# Altium PCB turret1.PcbDoc
Units mm, origin at the board's own origin, x right, y up, seen from the top; angles counter-clockwise.
Board outline 80 x 80 mm, 2 copper layers (Top Layer, Bottom Layer); 78 components, 59 nets, 253 pads, 29 vias.
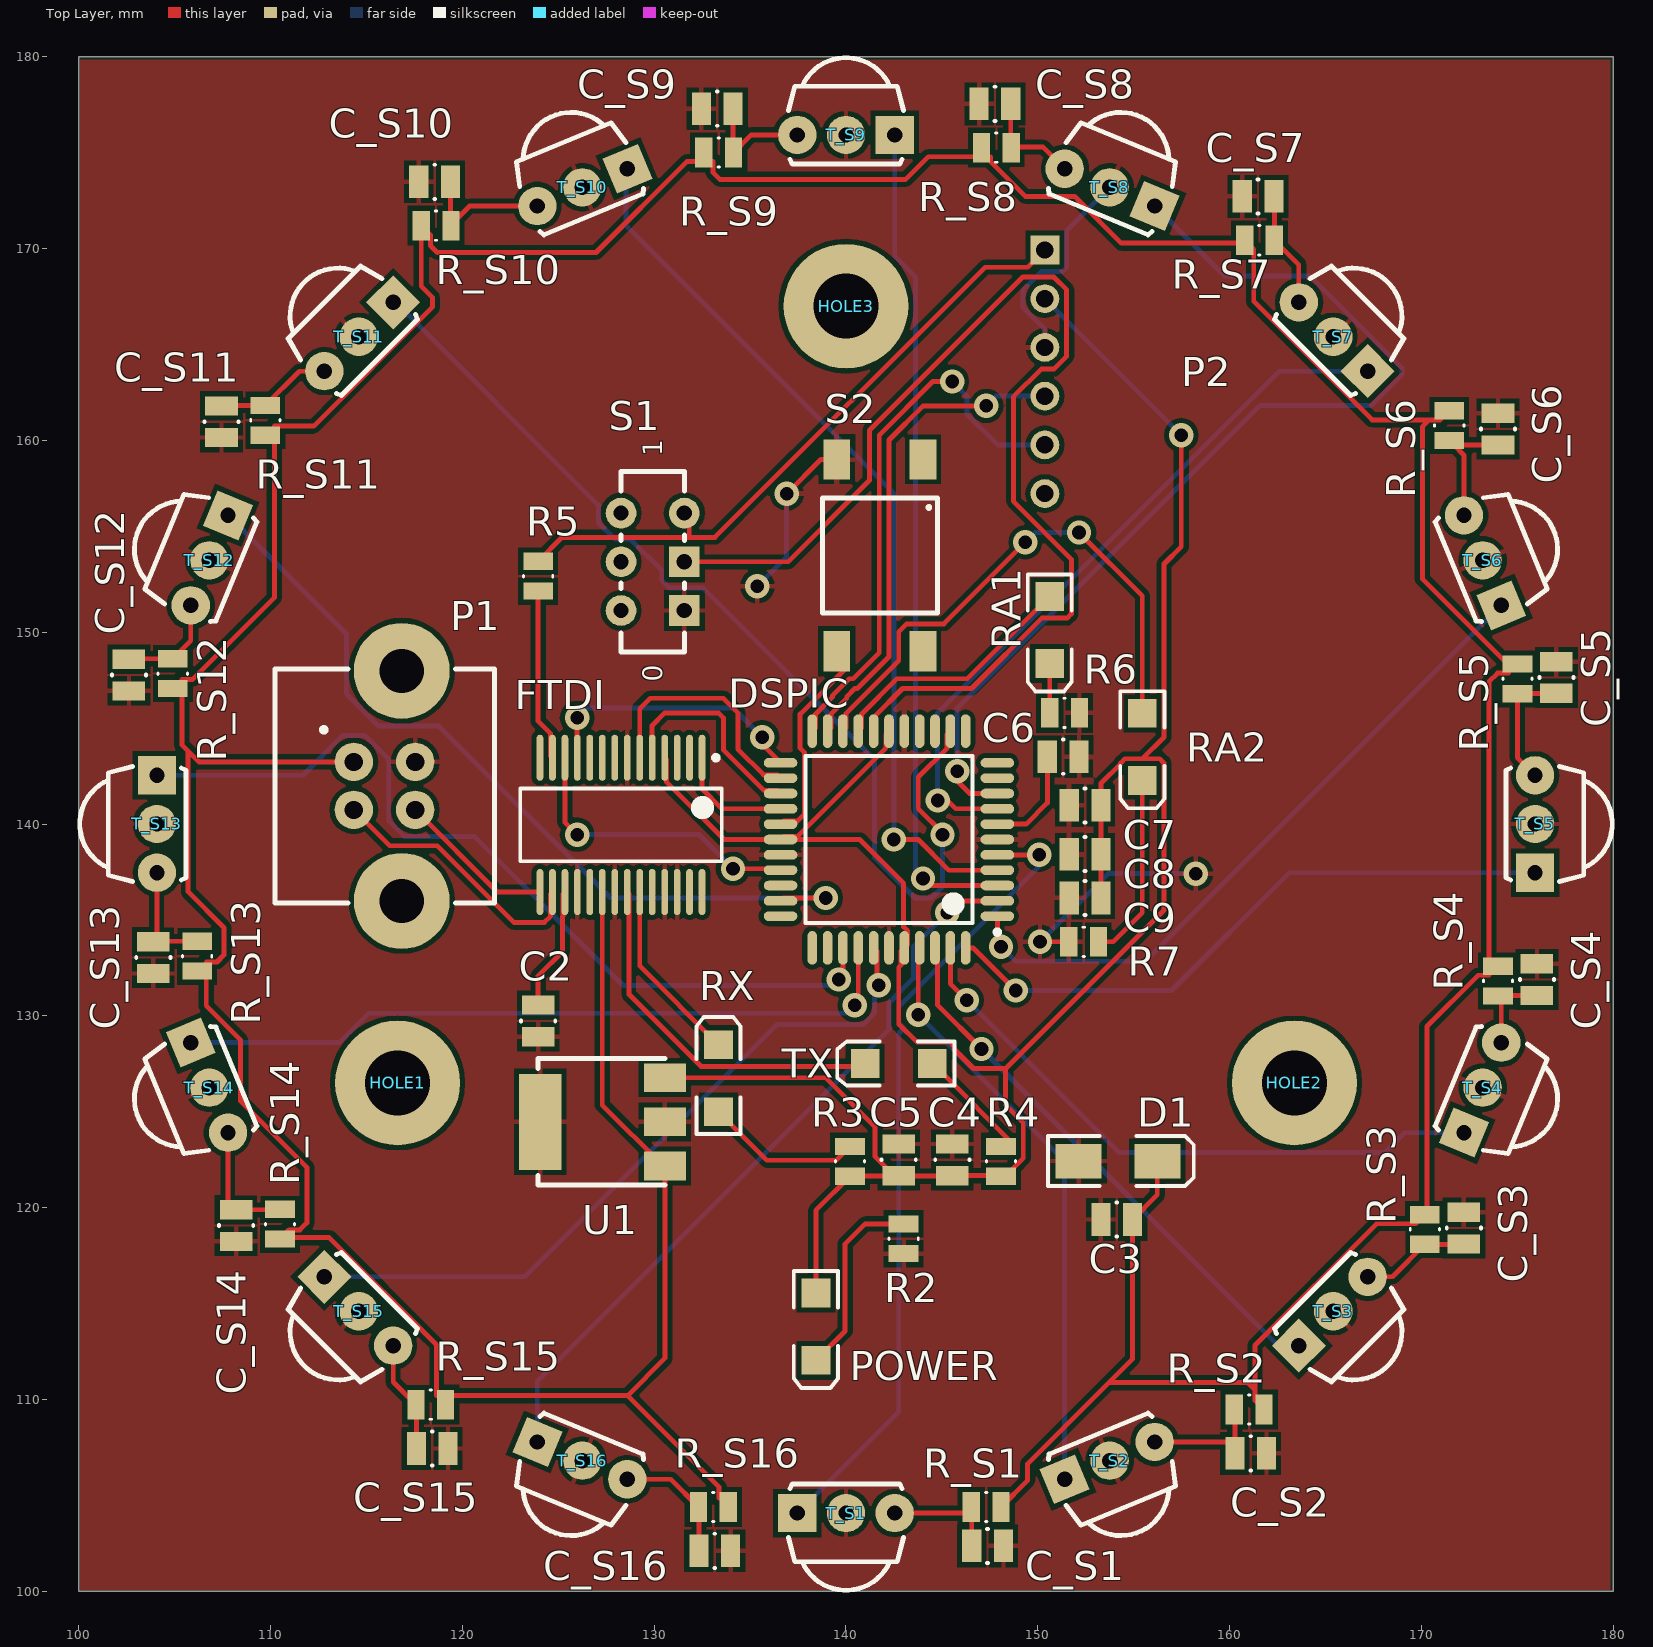
[diagram p0: Top Layer view]
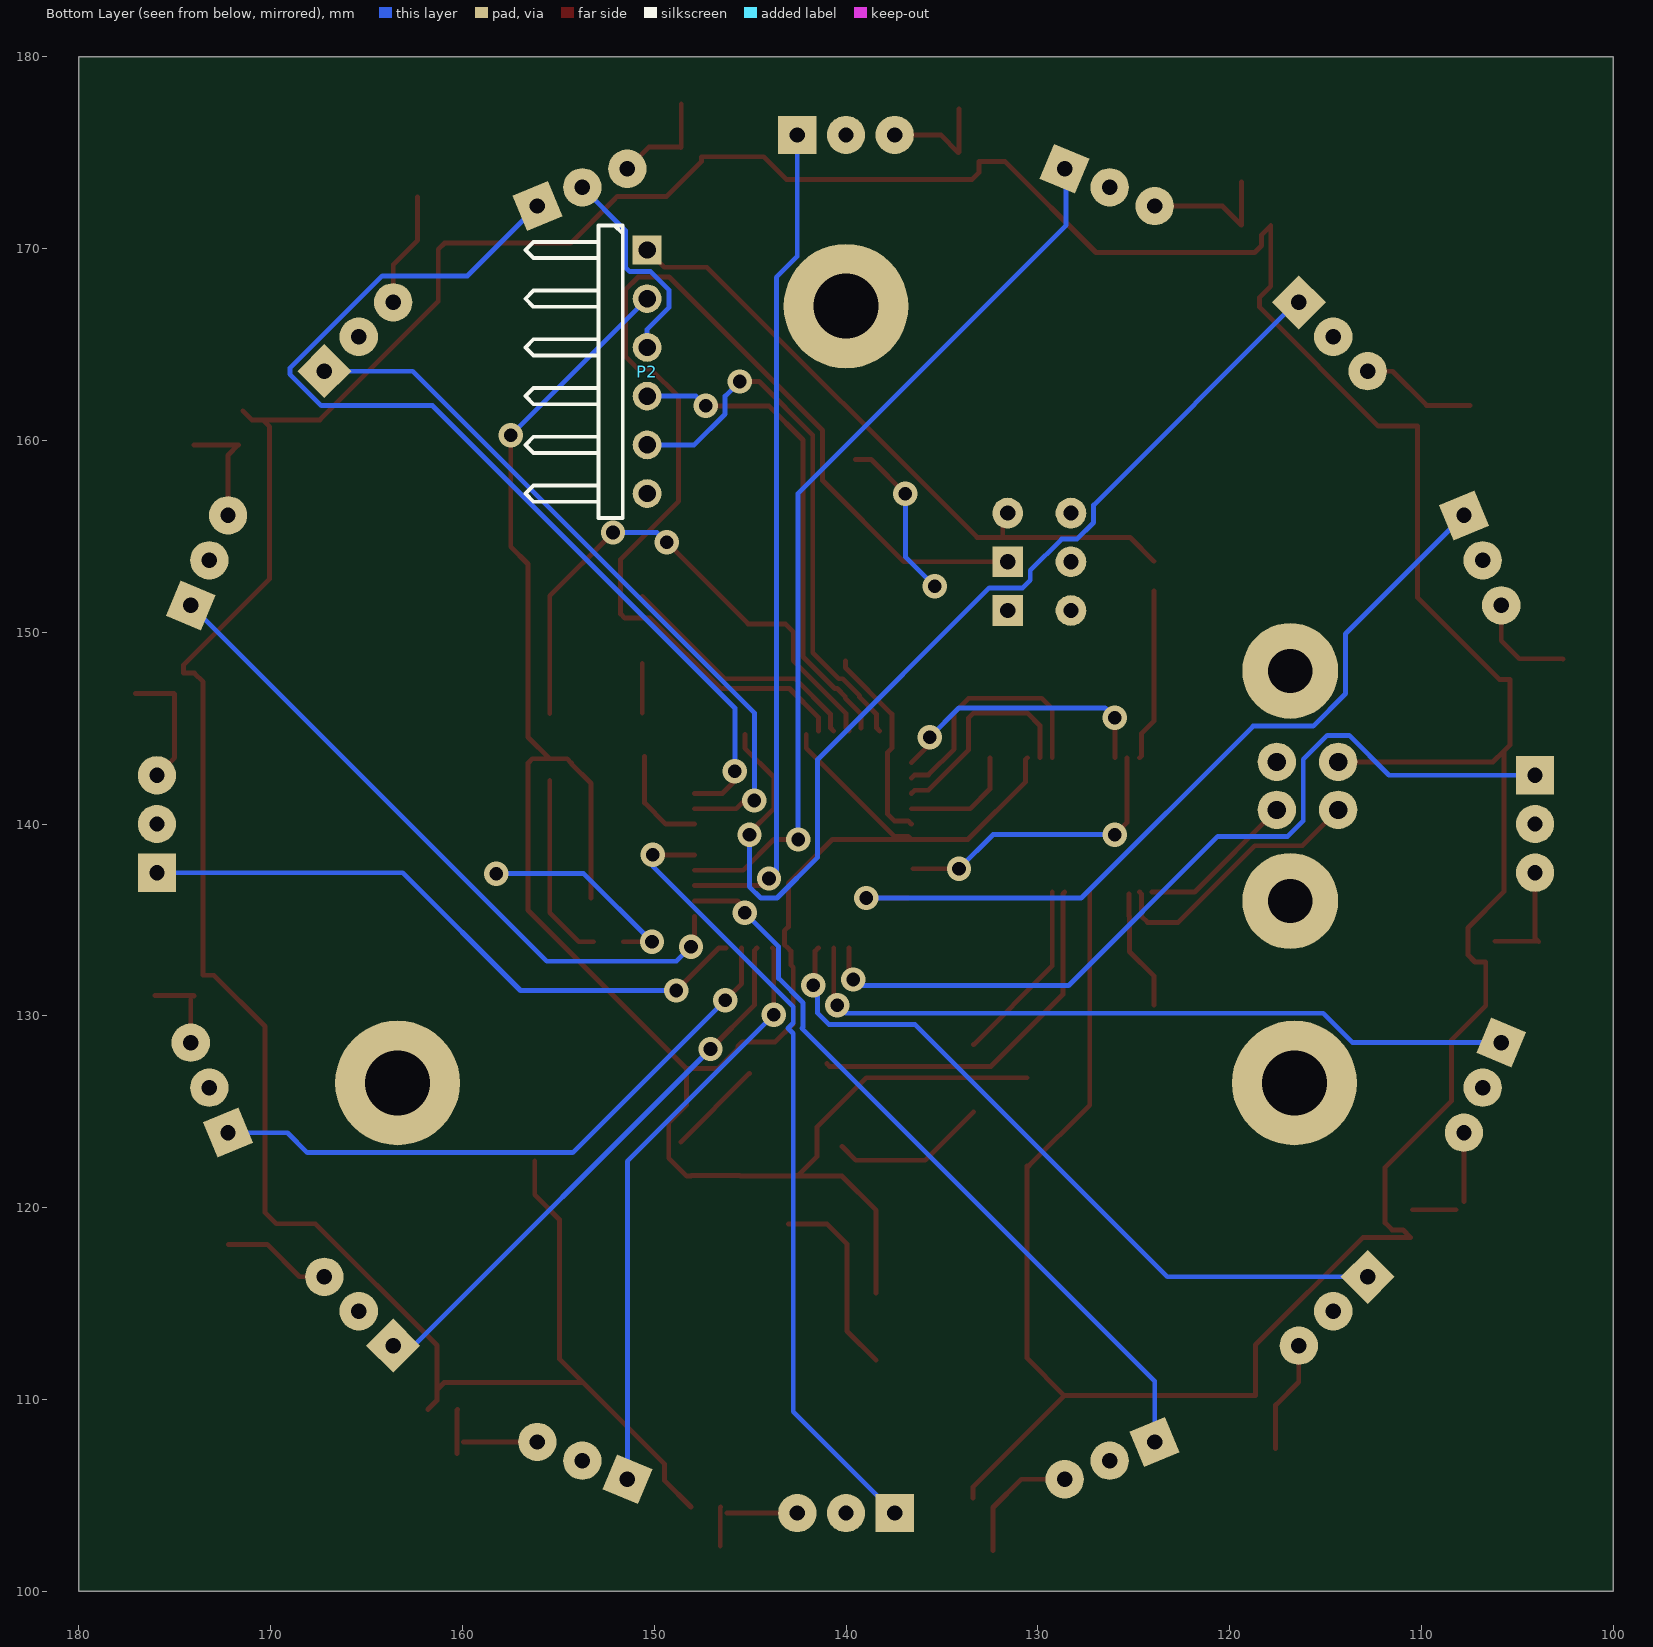
[diagram p1: Bottom Layer view, seen from below]
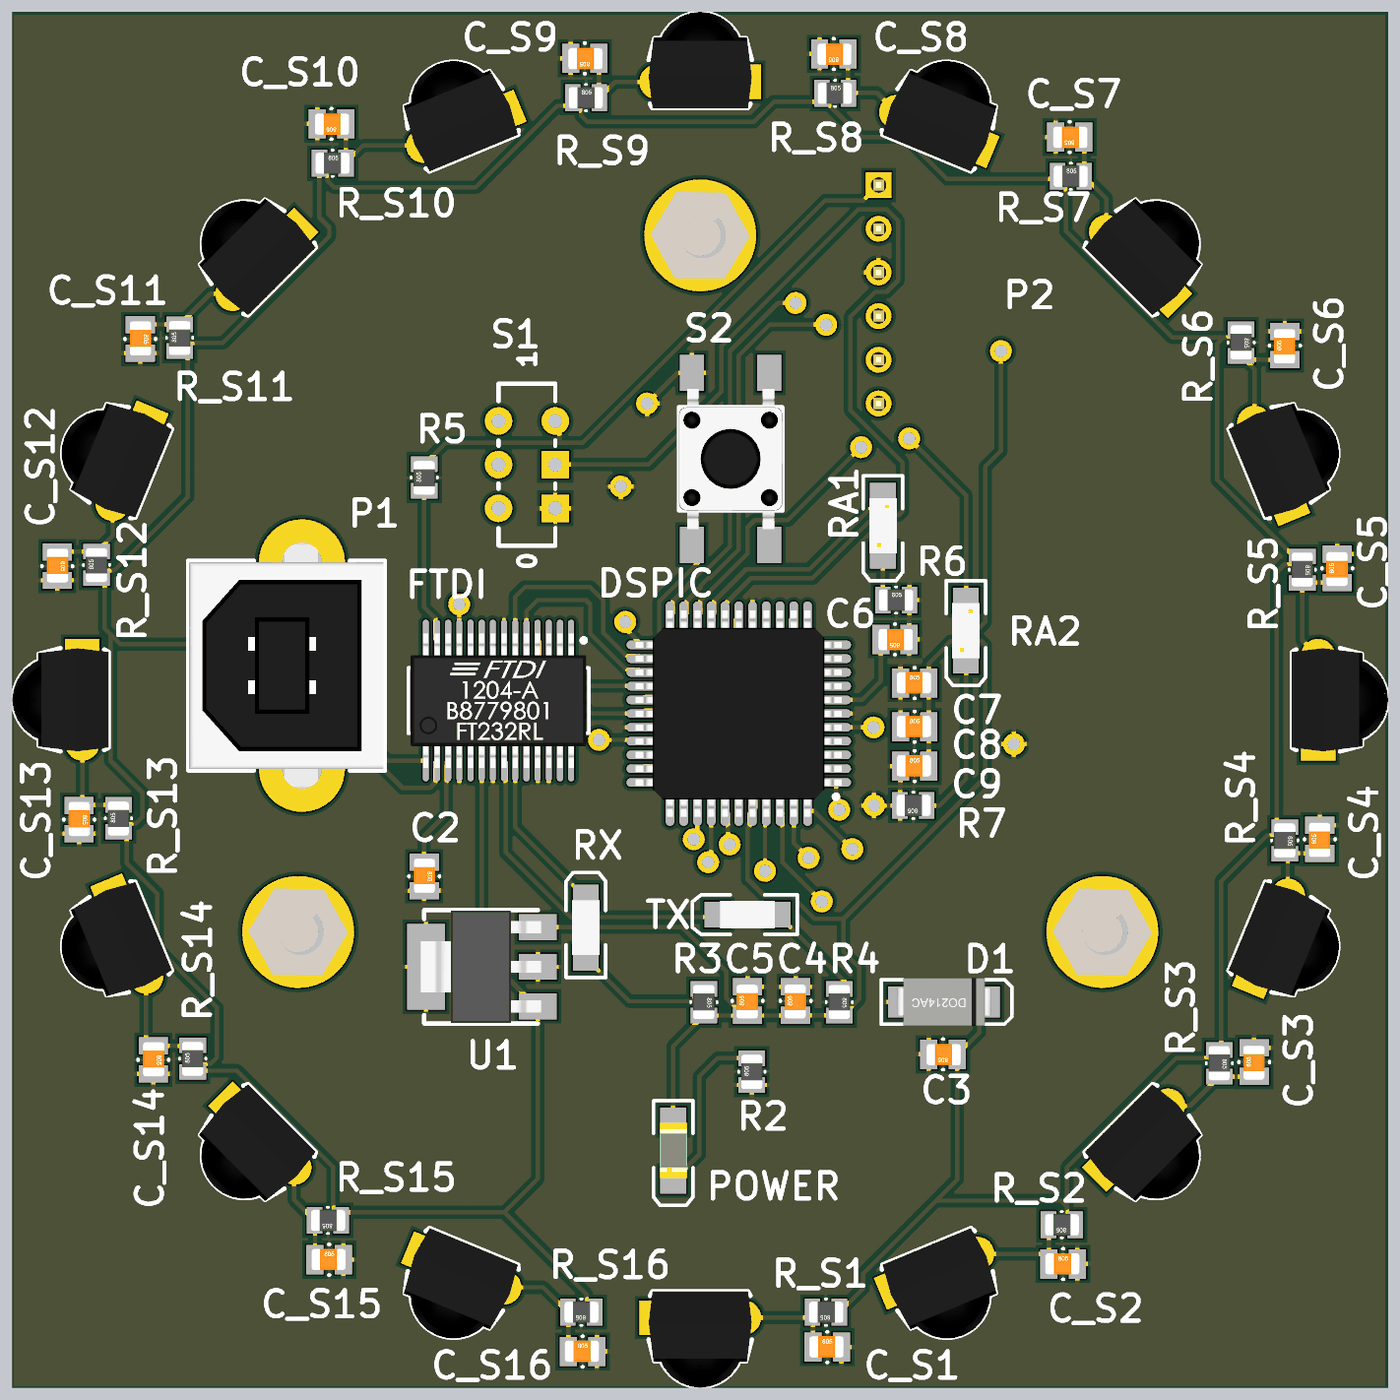
[diagram p2: 3D render of the assembled board from above, using the file's embedded part models]

## Layer stack, top to bottom
Top Layer: signal copper 0.0356
Dielectric: dielectric 0.32, FR-4, Dk 4.8
Bottom Layer: signal copper 0.0356

## Board outline
100,100 180,100 180,180 100,180

## Design rules (kind name [scope] priority, off if disabled: settings)
Clearance [All] p1: gap=0.254
HoleSize [All] p1: absolutevalues=TRUE maxlimit=3.556 minlimit=0.025 maxpercent=80.000 minpercent=20.000
MinimumSolderMaskSliver [All] p1: minsoldermaskwidth=0.025
PolygonConnect [All] p1: connectstyle=Relief reliefconductorwidth=0.254 reliefentries=4 polygonreliefangle="90 Angle"
RoutingVias [All] p1: holewidth=0.711 width=1.27 viastyle="Through Hole" minholewidth=0.711 minwidth=1.27 maxholewidth=0.711 maxwidth=1.27
SilkToSilkClearance [All] p1: silktosilkclearance=0.025
SilkscreenOverComponentPads [All] p1: minsilkscreentomaskgap=0.025
SolderMaskExpansion [All] p1: expansion=0.102
Width [All] p1: maxlimit=0.508 minlimit=0.254 preferedwidth=0.254
24 further rules are at their usual default settings.

## Classes and differential pairs
channel class tsop: S1 S2 S3 S4 S5 S6 S7 S8 S9 S10 S11 S12 S13 S14 S15 S16 S17 S18 S19 S20 S21 S22 S23 S24
net class TSOP[1..16]: TSOP1 TSOP2 TSOP3 TSOP4 TSOP5 TSOP6 TSOP7 TSOP8 TSOP9 TSOP10 TSOP11 TSOP12 TSOP13 TSOP14 TSOP15 TSOP16
component class turret1: C2 C3 C4 C5 C6 C7 C8 C9 D1 DSPIC FTDI HOLE1 HOLE2 HOLE3 P1 P2 POWER R2 R3 R4 R5 R6 R7 RA1 RA2 RX S1 S2 TX U1
component class S16: C_S16 R_S16 T_S16
component class S15: C_S15 R_S15 T_S15
component class S14: C_S14 R_S14 T_S14
component class S13: C_S13 R_S13 T_S13
component class S12: C_S12 R_S12 T_S12
component class S11: C_S11 R_S11 T_S11
component class S10: C_S10 R_S10 T_S10
component class S9: C_S9 R_S9 T_S9
component class S8: C_S8 R_S8 T_S8
component class S7: C_S7 R_S7 T_S7
component class S6: C_S6 R_S6 T_S6
component class S5: C_S5 R_S5 T_S5
component class S4: C_S4 R_S4 T_S4
component class S3: C_S3 R_S3 T_S3
component class S2: C_S2 R_S2 T_S2
component class S1: C_S1 R_S1 T_S1

## Components (designator, comment, footprint, x,y, rotation, side; value= is the part's Value field where it differs from the comment)
C2 "CAP" C0805C 123.952,130.556 r270 top
C3 "" C0805C 154.94,119.38 r180 top
C4 "" C0805C 145.542,121.666 r90 top
C5 "" C0805C 142.748,121.666 r90 top
C6 "CAP" C0805C 152.146,143.51 r180 top
C7 "CAP" C0805C 151.638,140.97 r0 top
C8 "CAP" C0805C 151.638,138.43 r0 top
C9 "CAP" C0805C 151.638,136.144 r0 top
C_S1 "CAP" C0805C 146.558,102.362 r0 top (schematic designator C)
C_S2 "CAP" C0805C 160.274,107.188 r0 top (schematic designator C)
C_S3 "CAP" C0805C 172.212,118.11 r90 top (schematic designator C)
C_S4 "CAP" C0805C 176.022,131.064 r90 top (schematic designator C)
C_S5 "CAP" C0805C 177.038,146.812 r90 top (schematic designator C)
C_S6 "CAP" C0805C 173.99,159.766 r90 top (schematic designator C)
C_S7 "CAP" C0805C 162.306,172.72 r180 top (schematic designator C)
C_S8 "CAP" C0805C 148.59,177.546 r180 top (schematic designator C)
C_S9 "CAP" C0805C 134.112,177.292 r180 top (schematic designator C)
C_S10 "CAP" C0805C 119.38,173.482 r180 top (schematic designator C)
C_S11 "CAP" C0805C 107.442,161.798 r270 top (schematic designator C)
C_S12 "CAP" C0805C 102.616,148.59 r270 top (schematic designator C)
C_S13 "CAP" C0805C 103.886,133.858 r270 top (schematic designator C)
C_S14 "CAP" C0805C 108.204,119.888 r270 top (schematic designator C)
C_S15 "CAP" C0805C 117.602,107.442 r0 top (schematic designator C)
C_S16 "CAP" C0805C 132.334,102.108 r0 top (schematic designator C)
D1 "5.6V" DSO-C2/X1.8 154.178,122.428 r0 top
DSPIC "DSPIC33FJ64MC804-I/PT" TQFP-PT44_N 142.24,139.192 r180 top
FTDI "FT232RL" SSOP-28_M 128.27,139.954 r270 top
HOLE1 "Hole" SCREW 116.62,126.5 r0 top
HOLE2 "Hole" SCREW 163.38,126.5 r0 top
HOLE3 "Hole" SCREW 140,167 r0 top
P1 "USB Vertical" "USB type B Vert" 116.84,141.986 r90 top
P2 "PICkit" HDR1X6H 150.368,169.926 r270 bottom
POWER "LED" LED1206G 138.43,113.792 r270 top
R2 "" C0805R 143.002,117.602 r90 top
R3 "RES" C0805R 140.208,123.19 r270 top
R4 "RES" C0805R 148.082,123.19 r270 top
R5 "RES" C0805R 123.952,152.146 r90 top
R6 "RES" C0805R 150.622,145.796 r0 top
R7 "RES" C0805R 153.162,133.858 r180 top
R_S1 "RES" C0805R 148.082,104.394 r180 top (schematic designator R)
R_S2 "RES" C0805R 161.798,109.474 r180 top (schematic designator R)
R_S3 "RES" C0805R 170.18,119.634 r270 top (schematic designator R)
R_S4 "RES" C0805R 173.99,132.588 r270 top (schematic designator R)
R_S5 "RES" C0805R 175.006,148.336 r270 top (schematic designator R)
R_S6 "RES" C0805R 171.45,161.544 r270 top (schematic designator R)
R_S7 "RES" C0805R 160.782,170.434 r0 top (schematic designator R)
R_S8 "RES" C0805R 147.066,175.26 r0 top (schematic designator R)
R_S9 "RES" C0805R 132.588,175.006 r0 top (schematic designator R)
R_S10 "RES" C0805R 117.856,171.196 r0 top (schematic designator R)
R_S11 "RES" C0805R 109.728,160.274 r90 top (schematic designator R)
R_S12 "RES" C0805R 104.902,147.066 r90 top (schematic designator R)
R_S13 "RES" C0805R 106.172,132.334 r90 top (schematic designator R)
R_S14 "RES" C0805R 110.49,118.364 r90 top (schematic designator R)
R_S15 "RES" C0805R 119.126,109.728 r180 top (schematic designator R)
R_S16 "RES" C0805R 133.858,104.394 r180 top (schematic designator R)
RA1 "LED" LED1206R 150.622,150.114 r270 top
RA2 "LED" LED1206R 155.448,144.018 r270 top
RX "LED" LED1206Y 133.35,126.746 r90 top
S1 "SW-DPDT/Reset" MCLSS22 131.572,153.67 r90 top
S2 "RC2" SPST-NO 144.018,159.004 r180 top
T_S1 "TSOP7000" "TSOP IR" 140,140 r0 top (schematic designator T)
T_S2 "TSOP7000" "TSOP IR" 140,140 r22.5 top (schematic designator T)
T_S3 "TSOP7000" "TSOP IR" 140,140 r45 top (schematic designator T)
T_S4 "TSOP7000" "TSOP IR" 140,140 r67.5 top (schematic designator T)
T_S5 "TSOP7000" "TSOP IR" 140,140 r90 top (schematic designator T)
T_S6 "TSOP7000" "TSOP IR" 140,140 r112.5 top (schematic designator T)
T_S7 "TSOP7000" "TSOP IR" 140,140 r135 top (schematic designator T)
T_S8 "TSOP7000" "TSOP IR" 140,140 r157.5 top (schematic designator T)
T_S9 "TSOP7000" "TSOP IR" 140,140 r180 top (schematic designator T)
T_S10 "TSOP7000" "TSOP IR" 140,140 r202.5 top (schematic designator T)
T_S11 "TSOP7000" "TSOP IR" 140,140 r225 top (schematic designator T)
T_S12 "TSOP7000" "TSOP IR" 140,140 r247.5 top (schematic designator T)
T_S13 "TSOP7000" "TSOP IR" 140,140 r270 top (schematic designator T)
T_S14 "TSOP7000" "TSOP IR" 140,140 r292.5 top (schematic designator T)
T_S15 "TSOP7000" "TSOP IR" 140,140 r315 top (schematic designator T)
T_S16 "TSOP7000" "TSOP IR" 140,140 r337.5 top (schematic designator T)
TX "LED" LED1206Y 142.748,127.508 r180 top
U1 "LM2937IMP-3.3" SOT-223 130.556,122.174 r90 top

## Footprints (in the part's own frame and the unit in brackets; to place one, negate y for a bottom-side part, rotate by r counter-clockwise, add the part's x,y. Pads: shape width x height; smd on the part's side, far side on the other; paste and mask are expansions set on the pad)
C0805C [mm]
  rect 1x1.7 smd: 1(0,0) 2(1.65,0)
  silkscreen extent 0.8,-0.89 0.85,0.89, body extent -0.21,-0.61 1.79,0.64, height 0.78
C0805R [mm]
  rect 0.9x1.55 smd: 1(0,0) 2(1.55,0)
  silkscreen extent 0.73,-0.76 0.81,0.76, body extent -0.24,-0.62 1.76,0.63, height 0.78
DSO-C2/X1.8 [mm] "Diode; DO-214-AC/SMA; 2 C-Bend Leads; Body 5 x 2.7 mm, inc. leads (LxW)"
  rect 2.4x1.8 smd: A(2.05,0) K(-2.05,0)
  silkscreen extent -3.65,-1.3 3.95,1.3, body extent -2.74,-1.4 2.74,1.4, height 2.28
HDR1X6H [mm] "Connector; Header; 6 Position; Right Angle"
  rect 1.5x1.5 hole 0.9: 1(0,0)
  round 1.5 hole 0.9: 2(2.54,0) 3(5.08,0) 4(7.62,0) 5(10.16,0) 6(12.7,0)
  silkscreen extent -1.27,-6.35 13.97,-1.27, body extent -1.17,-5.85 13.87,1.25, height 5.42
LED1206G [mm] "SMT LED; 2 Flat Leads; 3.2X1.6X1.1"
  rect 1.5x1.5 smd: 1(-1.75,0) 2(1.75,0)
  silkscreen extent -2.9,-1.15 3.2,1.15, body extent -1.6,-0.8 1.6,0.8, height 1.11
LED1206R [mm] "SMT LED; 2 Flat Leads; 3.2X1.6X1.1"
  rect 1.5x1.5 smd: 1(-1.75,0) 2(1.75,0)
  silkscreen extent -2.9,-1.15 3.2,1.15, body extent -1.6,-0.8 1.6,0.8, height 1.11
LED1206Y [mm] "SMT LED; 2 Flat Leads; 3.2X1.6X1.1"
  rect 1.5x1.5 smd: 1(-1.75,0) 2(1.75,0)
  silkscreen extent -2.9,-1.15 3.2,1.15, body extent -1.6,-0.8 1.6,0.8, height 1.11
MCLSS22 [mm] "Slide Switch DPDT"
  rect 1.6x1.6 hole 0.8: 1(0,0) 2(-2.54,0)
  round 1.6 hole 0.8: 3(2.54,0) 4(0,3.3) 5(-2.54,3.3) 6(2.54,3.3)
  silkscreen extent -4.7,0 4.7,3.3, body extent -4.7,-2 4.7,3.3, height 3.5
SCREW [mm] "Mounting Hole M3"
  round 6.5 hole 3.4: 1(0,0)
  body extent -2.89,-2.52 2.89,2.52, height 10
SOT-223 [mm] "Surface mounted, 4 pin package"
  rect 1.5x2.2 smd: 1(0,0) 2(2.3,0) 3(4.6,0)
  rect 5x2.2 smd: 4(2.3,6.5)
  silkscreen extent -1,0 5.6,6.6, body extent -0.95,-0.2 5.55,6.8, height 1.64
SPST-NO [mm] "Tactile Switch SPST-NO 6x6mm"
  rect 1.4x2.1 smd: 1(0,0) 2(4.5,0) 3(4.5,10) 4(0,10)
  silkscreen extent -0.75,2 5.25,8, body extent -0.75,0.93 5.25,9.08, height 5
SSOP-28_M [mm] "SOP, 28-Leads, Body 10.2x5.3mm, Pitch 0.65mm, IPC Low Density"
  oval 2.4x0.35 smd: 1(-3.5,4.225) 2(-3.5,3.575) 3(-3.5,2.925) 4(-3.5,2.275) 5(-3.5,1.625) 6(-3.5,0.975) 7(-3.5,0.325) 8(-3.5,-0.325) 9(-3.5,-0.975) 10(-3.5,-1.625) 11(-3.5,-2.275) 12(-3.5,-2.925) 13(-3.5,-3.575) 14(-3.5,-4.225) 15(3.5,-4.225) 16(3.5,-3.575) 17(3.5,-2.925) 18(3.5,-2.275) 19(3.5,-1.625) 20(3.5,-0.975) 21(3.5,-0.325) 22(3.5,0.325) 23(3.5,0.975) 24(3.5,1.625) 25(3.5,2.275) 26(3.5,2.925) 27(3.5,3.575) 28(3.5,4.225)
  silkscreen extent -3.62,-5.25 1.9,5.25, body extent -3.91,-5.1 3.91,5.1, height 1.98
TQFP-PT44_N [mm] "Thin QFP, 44-Leads, Body 10x10mm, Pitch 0.8mm, IPC Medium Density"
  oval 1.75x0.5 smd: 1(-5.65,4) 2(-5.65,3.2) 3(-5.65,2.4) 4(-5.65,1.6) 5(-5.65,0.8) 6(-5.65,0) 7(-5.65,-0.8) 8(-5.65,-1.6) 9(-5.65,-2.4) 10(-5.65,-3.2) 11(-5.65,-4) 23(5.65,-4) 24(5.65,-3.2) 25(5.65,-2.4) 26(5.65,-1.6) 27(5.65,-0.8) 28(5.65,0) 29(5.65,0.8) 30(5.65,1.6) 31(5.65,2.4) 32(5.65,3.2) 33(5.65,4)
  oval 0.5x1.75 smd: 12(-4,-5.65) 13(-3.2,-5.65) 14(-2.4,-5.65) 15(-1.6,-5.65) 16(-0.8,-5.65) 17(0,-5.65) 18(0.8,-5.65) 19(1.6,-5.65) 20(2.4,-5.65) 21(3.2,-5.65) 22(4,-5.65) 34(4,5.65) 35(3.2,5.65) 36(2.4,5.65) 37(1.6,5.65) 38(0.8,5.65) 39(0,5.65) 40(-0.8,5.65) 41(-1.6,5.65) 42(-2.4,5.65) 43(-3.2,5.65) 44(-4,5.65)
  silkscreen extent -5.77,-4.35 4.35,4.95, body extent -6,-6 6,6, height 1.05
"TSOP IR" [mm] "TSOP IR Receiver, Vishay"
  rect 2x2 hole 0.8: 1(-2.54,-35.924)
  round 2 hole 0.8: 2(0,-35.924) 3(2.54,-35.924)
  silkscreen extent -3,-39.95 3,-34.4, body extent -3,-40 3,-34.4, height 8.45
"USB type B Vert" [mm] "USB 2.0 chassis socket type B, upright version, for printed circuit boards ; Lumberg 2411 01  or  MC32597"
  round 2 hole 0.95: 1(1.25,2.5) 2(-1.25,2.5) 3(-1.25,-0.7) 4(1.25,-0.7)
  round 5 hole 2.3: 5(6,0) 6(-6,0)
  silkscreen extent -6.1,-4.83 6.1,6.6, body extent -7.15,-4.75 7.15,6.55, height 16

## Part data
C2 C6 C7 C8 C9 C_S1 C_S2 C_S3 C_S4 C_S5 C_S6 C_S7 C_S8 C_S9 C_S10 C_S11 C_S12 C_S13 C_S14 C_S15 C_S16: "Capacitor"
C3 C4 C5: library part "Cap Semi", "Capacitor (Semiconductor SIM Model)"
D1: library part ZENER, "Zener Diode"
DSPIC: "High-Performance 16-bit Digital Signal Controller, 64 KB Flash, 16 KB RAM, 44-Pin TQFP, Industrial Temperature"
FTDI: "USB UART Asynchronous Serial Data Transfer Chip, SSOP-28, Tube"
HOLE1 HOLE2 HOLE3: "Mounting Hole for screws"
P1: library part "USB Con", "USB Connector"
P2: library part "Header ICSP", "Header, 6-Pin, Right Angle"
POWER: "Typical LED"
R2: library part Res3, "Resistor"
R3 R4 R5 R6 R7 R_S1 R_S2 R_S3 R_S4 R_S5 R_S6 R_S7 R_S8 R_S9 R_S10 R_S11 R_S12 R_S13 R_S14 R_S15 R_S16: "Resistor"
RA1 RA2 RX TX: library part LED2, "Typical RED, GREEN, YELLOW, AMBER GaAs LED"
S1: library part SW-DPDT, "Double-Pole, Double-Throw Switch, ref MCLSS22"
S2: library part SPST-NO, "Tactile Switch 7.3mm, SMD"
T_S1 T_S2 T_S3 T_S4 T_S5 T_S6 T_S7 T_S8 T_S9 T_S10 T_S11 T_S12 T_S13 T_S14 T_S15 T_S16: "Vishay 455kHz IR Receiver"
U1: "500 mA Low Dropout Regulator"

## Via types
v1: diameter 1.27, hole 0.711, Top Layer to Bottom Layer, 29 vias

## Nets (pads, with @x,y where several pads share a name; then routed paths per layer and width w, separated by ;. In a path a pad name is that pad's centre, name@x,y a point inside that pad or via, vN(x,y) a via of type N, cw(c..) or ccw(c..) an arc to the next point about the centre after c; other vN are vias at no path point)
+3V3: C4.1 C5.1 C7.2 C8.2 C9.2 DSPIC.17 DSPIC.28 DSPIC.40 FTDI.4 P2.2 POWER.1 R3.2 R4.2 U1.3 | length 131.8
  Top Layer w0.254: FTDI.4 130.639,143.36 130.639,142.199 133.646,139.192 DSPIC.28 ; U1.3 138.94,126.774 141.517,124.197 141.517,122.658 142.509,121.666 C5.1 ; POWER.1 138.43,119.862 R3.2 145.516,121.64 C4.1 R4.2@148.056,121.666 ; DSPIC.17@142.071,144.673 142.071,143.956 137.476,139.361 136.759,139.361 DSPIC.28 ; R4.2 148.296,121.64 149.238,122.582 149.238,124.431 148.322,125.347 148.322,127.254 ; C9.2 C8.2 C7.2 153.288,142.112 154.317,143.141 154.317,143.176 154.54,143.399 155.448,143.399 ; v1(157.48,160.274) 157.48,154.456 156.579,153.555 156.579,144.53 155.448,143.399 ; DSPIC.28 140.716,139.192 143.002,136.906 143.002,134.635 143.209,134.428 143.209,133.711 DSPIC.40 142.871,133.373 142.871,132.656 142.748,132.533 142.748,129.54 142.792,129.54 143.693,128.639 145.406,128.639 145.629,128.416 145.629,128.27 146.645,127.254 148.322,127.254 ; 148.322,127.254 156.579,135.511 156.579,143.176 156.356,143.399 155.448,143.399
  Bottom Layer w0.254: P2.2 v1(157.48,160.274)
+5V0: C3.1 D1.A FTDI.20 P1.1 R_S1.1 R_S2.1 R_S3.1 R_S4.1 R_S5.1 R_S6.1 R_S7.1 R_S8.1 R_S9.1 R_S10.1 R_S11.1 R_S12.1 R_S13.1 R_S14.1 R_S15.1 R_S16.1 U1.1 | length 287.9
  Top Layer w0.254: P1.1 106.267,143.236 105.703,143.8 ; FTDI.20 127.295,125.346 130.467,122.174 U1.1 130.556,112.144 128.613,110.201 ; 133.385,104.867 133.385,105.429 128.613,110.201 ; R_S1.1 149.467,105.779 149.467,106.639 153.704,110.876 ; D1.A 156.228,120.668 C3.1 154.94,112.112 153.704,110.876 ; R_S2.1 161.325,109.947 161.325,110.509 ; R_S6.1 170.977,161.071 170.415,161.071 ; 105.703,143.8 105.375,144.128 105.375,147.539 105.937,147.539 110.201,151.803 110.201,160.747 112.244,160.747 118.435,166.938 118.435,167.458 117.856,168.037 R_S10.1 118.329,170.723 118.329,170.161 118.696,169.794 126.966,169.794 131.705,174.533 133.061,174.533 133.061,173.971 133.428,173.604 143.107,173.604 144.29,174.787 147.539,174.787 147.539,174.533 149.352,172.72 151.916,172.72 152.102,172.534 154.352,170.284 160.932,170.284 161.255,169.961 161.255,167.248 167.432,161.071 170.415,161.071 ; 105.703,143.8 105.703,136.465 107.574,134.594 107.574,133.174 107.207,132.807 106.645,132.807 106.645,130.527 108.438,128.735 108.438,125.552 111.892,122.097 111.892,119.204 111.525,118.837 110.963,118.837 110.561,118.435 113.062,118.435 118.653,112.844 118.653,110.201 128.613,110.201 ; 153.704,110.876 160.958,110.876 161.325,110.509 ; 161.325,110.509 161.325,112.822 167.664,119.161 169.707,119.161 R_S3.1 170.284,119.738 170.284,129.444 172.955,132.115 173.517,132.115 173.517,147.409 173.971,147.863 174.533,147.863 174.533,148.295 170.048,152.78 170.048,160.704 170.415,161.071
CLK12: DSPIC.30 FTDI.12 | length 15.5
  Top Layer w0.254: FTDI.12 125.345,140.085 v1(125.984,139.446) ; v1(134.112,137.668) DSPIC.30@136.514,137.668
  Bottom Layer w0.254: v1(125.984,139.446) 132.334,139.446 v1(134.112,137.668)
D+: FTDI.15 P1.3 | length 8.3
  Top Layer w0.254: P1.3 121.822,136.454 FTDI.15
D-: FTDI.16 P1.2 | length 14.1
  Top Layer w0.254: P1.2 116.209,138.867 118.691,138.867 122.685,134.873 124.275,134.873 124.601,135.199 124.601,136.36 FTDI.16
FLUSH: DSPIC.24 FTDI.6 | length 13
  Top Layer w0.254: FTDI.6 129.245,146.009 129.794,146.558 133.604,146.558 134.366,145.796 134.366,143.899 135.704,142.561 136.421,142.561 DSPIC.24
GND: C2.2 C3.2 C4.2 C5.2 C6.1 C7.1 C8.1 C9.1 C_S1.2 C_S2.2 C_S3.2 C_S4.2 C_S5.2 C_S6.2 C_S7.2 C_S8.2 C_S9.2 C_S10.2 C_S11.2 C_S12.2 C_S13.2 C_S14.2 C_S15.2 C_S16.2 D1.K DSPIC.6 DSPIC.16 DSPIC.29 DSPIC.39 FTDI.7 FTDI.18 FTDI.21 FTDI.25 FTDI.26 P1.4 P2.3 R2.1 R6.2 R7.2 S1.2 S2.2 T_S1.2 T_S2.2 T_S3.2 T_S4.2 T_S5.2 T_S6.2 T_S7.2 T_S8.2 T_S9.2 T_S10.2 T_S11.2 T_S12.2 T_S13.2 T_S14.2 T_S15.2 T_S16.2 U1.2 U1.4 | length 31.2
  Top Layer w0.254: v1(136.906,157.226) 138.684,159.004 S2.2 ; v1(150.114,133.858) R7.2
  Bottom Layer w0.254: v1(135.382,152.4) 136.906,153.924 v1(136.906,157.226) ; v1(150.114,133.858) 153.67,137.414 v1(158.242,137.414) ; P2.3 150.368,165.787 149.237,166.918 149.237,167.854 150.178,168.795 151.276,168.795 151.499,169.018 151.499,170.941 T_S8.2
GPIO: FTDI.13 R5.1 | length 9
  Top Layer w0.254: R5.1 123.952,145.358 124.601,144.709 124.601,143.548 FTDI.13
MCLR: P2.1 R5.2 S1.3 | length 34.5
  Top Layer w0.254: R5.2 125.196,154.94 131.826,154.94 ; S1.3 131.826,155.956 131.826,154.94 ; P2.1 149.467,169.025 147.25,169.025 133.165,154.94 131.826,154.94
NetC2_1: C2.1 FTDI.17 | length 6.3
  Top Layer w0.254: C2.1 123.952,132.08 125.222,133.35 125.222,135.17 125.251,135.199 FTDI.17@125.251,136.36
NetC6_2: C6.2 DSPIC.7 | length 5.5
  Top Layer w0.254: DSPIC.7 149.39,139.992 150.496,141.098 C6.2
NetC_S1_1: C_S1.1 R_S1.2 T_S1.3 | length 5.7
  Top Layer w0.254: T_S1.3 R_S1.2@146.214,104.076 ; R_S1.2 146.558,104.368 C_S1.1
NetC_S2_1: C_S2.1 R_S2.2 T_S2.3 | length 6.1
  Top Layer w0.254: T_S2.3 C_S2.1@159.933,107.783 ; R_S2.2 160.274,109.448 C_S2.1
NetC_S3_1: C_S3.1 R_S3.2 T_S3.3 | length 5.7
  Top Layer w0.254: T_S3.3 168.49,116.394 R_S3.2 C_S3.1@172.186,118.084
NetC_S4_1: C_S4.1 R_S4.2 T_S4.3 | length 4.3
  Top Layer w0.254: R_S4.2 174.016,131.064 C_S4.1 ; T_S4.3 R_S4.2@174.161,130.867
NetC_S5_1: C_S5.1 R_S5.2 T_S5.3 | length 6.6
  Top Layer w0.254: R_S5.2 175.006,143.458 T_S5.3 ; R_S5.2@175.032,146.812 C_S5.1
NetC_S6_1: C_S6.1 R_S6.2 T_S6.3 | length 6.2
  Top Layer w0.254: T_S6.3 172.217,159.227 171.678,159.766 C_S6.1
NetC_S7_1: C_S7.1 R_S7.2 T_S7.3 | length 6
  Top Layer w0.254: C_S7.1@162.332,172.694 R_S7.2 163.606,169.16 T_S7.3
NetC_S8_1: C_S8.1 R_S8.2 T_S8.3 | length 5.6
  Top Layer w0.254: C_S8.1 R_S8.2@148.59,175.286 ; R_S8.2 R_S8.2@148.59,175.286 ; T_S8.3 150.276,175.286 R_S8.2@148.59,175.286
NetC_S9_1: C_S9.1 R_S9.2 T_S9.3 | length 6
  Top Layer w0.254: R_S9.2@134.112,175.032 C_S9.1 ; R_S9.2 135.056,175.924 T_S9.3
NetC_S10_1: C_S10.1 R_S10.2 T_S10.3 | length 7.2
  Top Layer w0.254: C_S10.1 119.38,171.222 120.375,172.217 T_S10.3
NetC_S11_1: C_S11.1 R_S11.2 T_S11.3 | length 6.1
  Top Layer w0.254: C_S11.1@107.468,161.824 R_S11.2 111.51,163.606 T_S11.3
NetC_S12_1: C_S12.1 R_S12.2 T_S12.3 | length 5.5
  Top Layer w0.254: C_S12.1 102.642,148.616 R_S12.2 105.839,149.553 T_S12.3
NetC_S13_1: C_S13.1 R_S13.2 T_S13.3 | length 7.6
  Top Layer w0.254: C_S13.1@103.912,133.884 R_S13.2 ; T_S13.3 C_S13.1@104.076,134.048 ; C_S13.1 C_S13.1@104.076,134.048 ; C_S13.1 C_S13.1@104.076,134.048 ; C_S13.1 C_S13.1@104.076,134.048 ; C_S13.1 C_S13.1@104.076,134.048 ; C_S13.1 C_S13.1@104.076,134.048 ; C_S13.1 C_S13.1@104.076,134.048 ; C_S13.1 C_S13.1@104.076,134.048
NetC_S14_1: C_S14.1 R_S14.2 T_S14.3 | length 5.9
  Top Layer w0.254: C_S14.1@107.783,120.309 T_S14.3 ; C_S14.1 R_S14.2@110.464,119.888
NetC_S15_1: C_S15.1 R_S15.2 T_S15.3 | length 6.1
  Top Layer w0.254: T_S15.3@116.612,112.802 T_S15.3 116.394,110.91 R_S15.2 117.602,109.702 C_S15.1
NetC_S16_1: C_S16.1 R_S16.2 T_S16.3 | length 6.6
  Top Layer w0.254: T_S16.3 130.863,105.839 R_S16.2 132.334,104.368 C_S16.1
NetDSPIC_18: DSPIC.18 S1.1 | length 60.8
  Top Layer w0.254: S1.1 136.981,153.67 141.224,157.913 141.224,160.528 149.213,168.517 150.836,168.517 151.499,167.854 151.499,164.378 150.836,163.715 150.178,163.715 148.729,162.266 148.729,156.826 151.753,153.802 151.753,150.956 151.53,150.733 150.209,150.733 146.541,147.065 142.95,147.065 142.949,147.066 142.947,147.066 141.44,145.559 DSPIC.18
NetDSPIC_19: DSPIC.19 RA1.1 | length 13.3
  Top Layer w0.254: DSPIC.19 140.809,145.011 140.809,145.728 142.655,147.574 143.159,147.574 143.16,147.573 146.331,147.573 RA1.1
NetDSPIC_20: DSPIC.20 RA2.1 | length 28.7
  Top Layer w0.254: DSPIC.20 140.009,145.011 140.009,145.769 142.748,148.508 142.748,150.023 143.16,150.435 145.101,150.435 v1(149.352,154.686) ; v1(152.146,155.194) 155.448,151.892 RA2.1
  Bottom Layer w0.254: v1(149.352,154.686) 149.86,155.194 v1(152.146,155.194)
NetDSPIC_27: DSPIC.27 S2.3 | length 10.5
  Top Layer w0.254: DSPIC.27 136.759,140.161 137.476,140.161 137.846,140.531 137.846,143.719 137.609,143.956 137.609,145.728 140.026,148.145 S2.3@140.026,148.496
NetPOWER_2: POWER.2 R2.2 | length 10.2
  Top Layer w0.254: POWER.2 139.954,113.566 139.954,118.11 140.996,119.152 R2.2
NetR3_1: R3.1 RX.1 | length 8.2
  Top Layer w0.254: RX.1 135.875,122.471 139.489,122.471 R3.1
NetR4_1: R4.1 TX.1 | length 5.1
  Top Layer w0.254: TX.1@145.034,127 R4.1@148.618,123.416
NetR6_1: R6.1 RA1.2 | length 2.6
  Top Layer w0.254: R6.1 RA1.2
NetR7_1: R7.1 RA2.2 | length 9.8
  Top Layer w0.254: R7.1 153.924,133.858 155.448,135.382 RA2.2
PGEC: DSPIC.22 P2.5 | length 28.7
  Top Layer w0.254: DSPIC.22 138.409,145.011 138.409,145.728 139.287,146.606 139.287,146.688 140.172,147.573 140.376,147.573 141.732,148.929 141.732,160.274 144.526,163.068 v1(145.542,163.068)
  Bottom Layer w0.254: v1(145.542,163.068) 146.304,162.306 146.304,161.377 147.915,159.766 P2.5
PGED: DSPIC.21 P2.4 | length 25.4
  Top Layer w0.254: DSPIC.21@139.209,145.011 139.209,145.728 140.038,146.557 140.038,146.642 140.461,147.065 140.586,147.065 142.24,148.719 142.24,160.02 144.018,161.798 v1(147.32,161.798)
  Bottom Layer w0.254: v1(147.32,161.798) 147.828,162.306 P2.4
RTS: DSPIC.23 FTDI.11 | length 14.4
  Top Layer w0.254: FTDI.11@125.984,143.465 v1(125.984,145.542) ; v1(135.636,144.526) 135.636,144.018 135.764,144.018 DSPIC.23
  Bottom Layer w0.254: v1(125.984,145.542) 126.492,146.05 134.112,146.05 v1(135.636,144.526)
RX: DSPIC.26 FTDI.1 | length 6.2
  Top Layer w0.254: FTDI.1 132.495,141.825 133.528,140.792 DSPIC.26
RXLED: FTDI.23 RX.2 | length 9.7
  Top Layer w0.254: FTDI.23 129.245,132.601 RX.2
TSOP1: DSPIC.5 T_S1.1 | length 42
  Top Layer w0.254: DSPIC.5 v1(150.076,138.392)
  Bottom Layer w0.254: T_S1.1 142.748,109.364 142.748,129.076 143.024,129.351 142.748,129.627 142.748,130.469 150.076,137.797 v1(150.076,138.392)
TSOP2: DSPIC.41 T_S2.1 | length 30.9
  Top Layer w0.254: v1(143.764,130.048) 143.764,133.466 DSPIC.41
  Bottom Layer w0.254: v1(143.764,130.048) 151.401,122.411 T_S2.1
TSOP3: DSPIC.42 T_S3.1 | length 29.2
  Top Layer w0.254: DSPIC.42 144.78,133.402 144.78,130.556 v1(147.066,128.27)
  Bottom Layer w0.254: v1(147.066,128.27) 162.534,112.802 T_S3.1
TSOP4: DSPIC.43 T_S4.1 | length 32.7
  Top Layer w0.254: DSPIC.43 145.44,131.674 v1(146.304,130.81)
  Bottom Layer w0.254: v1(146.304,130.81) 154.245,122.869 168.081,122.869 169.118,123.906 T_S4.1
TSOP5: DSPIC.44 T_S5.1 | length 33.1
  Top Layer w0.254: DSPIC.44 146.62,133.542 v1(148.844,131.318)
  Bottom Layer w0.254: v1(148.844,131.318) 156.972,131.318 163.114,137.46 T_S5.1
TSOP6: DSPIC.1 T_S6.1 | length 35.7
  Top Layer w0.254: DSPIC.1 147.89,133.796 v1(148.082,133.604)
  Bottom Layer w0.254: v1(148.082,133.604) 148.844,132.842 155.603,132.842 T_S6.1
TSOP7: DSPIC.8 T_S7.1 | length 37.7
  Top Layer w0.254: v1(144.78,141.224) 145.288,141.224 145.72,140.792 DSPIC.8
  Bottom Layer w0.254: v1(144.78,141.224) 144.78,145.796 162.59,163.606 T_S7.1
TSOP8: DSPIC.9 T_S8.1 | length 53.3
  Top Layer w0.254: v1(145.796,142.748) 145.796,142.24 146.444,141.592 DSPIC.9
  Bottom Layer w0.254: v1(145.796,142.748) 145.796,146.05 161.557,161.811 167.356,161.811 168.993,163.448 168.993,163.764 164.178,168.579 159.732,168.579 T_S8.1
TSOP9: DSPIC.3 T_S9.1 | length 43.4
  Top Layer w0.254: v1(144.018,137.16) 144.386,136.792 DSPIC.3
  Bottom Layer w0.254: T_S9.1 142.54,169.595 143.631,168.504 143.631,137.547 v1(144.018,137.16)
TSOP10: DSPIC.4 T_S10.1 | length 46.8
  Top Layer w0.254: v1(142.494,139.192) 143.764,139.192 145.364,137.592 DSPIC.4
  Bottom Layer w0.254: T_S10.1 128.524,174.086 128.524,171.214 142.494,157.244 v1(142.494,139.192)
TSOP11: DSPIC.13 T_S11.1 | length 54.6
  Top Layer w0.254: v1(145.034,139.446) 145.034,139.533 143.764,140.803 143.764,142.449 145.271,143.956 DSPIC.13@145.271,144.673
  Bottom Layer w0.254: T_S11.1 116.52,167.198 127.091,156.627 127.091,155.721 127.961,154.851 128.761,154.851 130.391,153.221 130.391,152.712 130.792,152.311 132.53,152.311 141.478,143.363 141.478,138.263 143.597,136.144 144.439,136.144 145.034,136.739 v1(145.034,139.446)
TSOP12: DSPIC.32 T_S12.1 | length 43.4
  Top Layer w0.254: DSPIC.32@136.742,136.144 v1(138.938,136.144)
  Bottom Layer w0.254: T_S12.1 113.959,149.918 113.959,146.793 115.647,145.105 118.772,145.105 127.733,136.144 v1(138.938,136.144)
TSOP13: DSPIC.36 T_S13.1 | length 45.6
  Top Layer w0.254: v1(139.624,131.89) 139.764,131.89 139.84,131.966 DSPIC.36
  Bottom Layer w0.254: T_S13.1 111.691,142.54 113.768,144.617 114.912,144.617 116.159,143.37 116.159,140.164 116.968,139.355 120.618,139.355 128.401,131.572 139.192,131.572 139.51,131.89 v1(139.624,131.89)
TSOP14: DSPIC.37 T_S14.1 | length 38.5
  Top Layer w0.254: v1(140.462,130.556) 140.64,130.734 DSPIC.37
  Bottom Layer w0.254: T_S14.1 113.584,128.599 115.116,130.131 140.037,130.131 v1(140.462,130.556)
TSOP15: DSPIC.38 T_S15.1 | length 38.5
  Top Layer w0.254: DSPIC.38 141.609,133.373 141.609,131.695 v1(141.714,131.59)
  Bottom Layer w0.254: T_S15.1 123.252,116.394 136.398,129.54 140.883,129.54 141.478,130.135 141.478,131.826 141.732,131.572 v1(141.714,131.59)
TSOP16: DSPIC.2 T_S16.1 | length 39.5
  Top Layer w0.254: v1(145.288,135.382) 145.288,135.636 145.644,135.992 DSPIC.2
  Bottom Layer w0.254: T_S16.1 123.906,110.952 142.305,129.351 142.24,129.417 142.24,130.679 143.51,131.949 143.51,133.604 v1(145.288,135.382)
TX: DSPIC.25 FTDI.5 | length 11.4
  Top Layer w0.254: FTDI.5 129.895,145.135 130.556,145.796 133.35,145.796 133.604,145.542 133.604,143.861 135.704,141.761 136.421,141.761 DSPIC.25
TXLED: FTDI.22 TX.2 | length 19.3
  Top Layer w0.254: FTDI.22 128.689,136.36 128.689,131.118 132.442,127.365 140.855,127.365 TX.2
pads on no net: DSPIC.10 DSPIC.11 DSPIC.12 DSPIC.14 DSPIC.15 DSPIC.31 DSPIC.33 DSPIC.34 DSPIC.35 FTDI.2 FTDI.3 FTDI.8 FTDI.9 FTDI.10 FTDI.14 FTDI.19 FTDI.24 FTDI.27 FTDI.28 HOLE1.1 HOLE2.1 HOLE3.1 P1.5 P1.6 P2.6 S1.4 S1.5 S1.6 S2.1 S2.4

## Polygon pours and split planes (outlines as drawn)
GND on Top Layer "Top Layer-No Net" (solid, pour order 6): 100.076,179.832 100.076,100.076 179.832,100.076 179.832,179.832

## Text inside footprints (layer, text, board x,y; h text height)
S1: Top Overlay "1" at 130.422,159.17 h1 r90; Top Overlay "0" at 130.422,147.42 h1 r90